# Altium PCB PCB2.PcbDoc
Units mm, origin at the board's own origin, x right, y up, seen from the top; angles counter-clockwise.
Board outline 160 x 150 mm, 2 copper layers (Top Layer, Bottom Layer); 398 components, 242 nets, 1225 pads, 0 vias.
Unrouted connection lines stored in the file: 874.
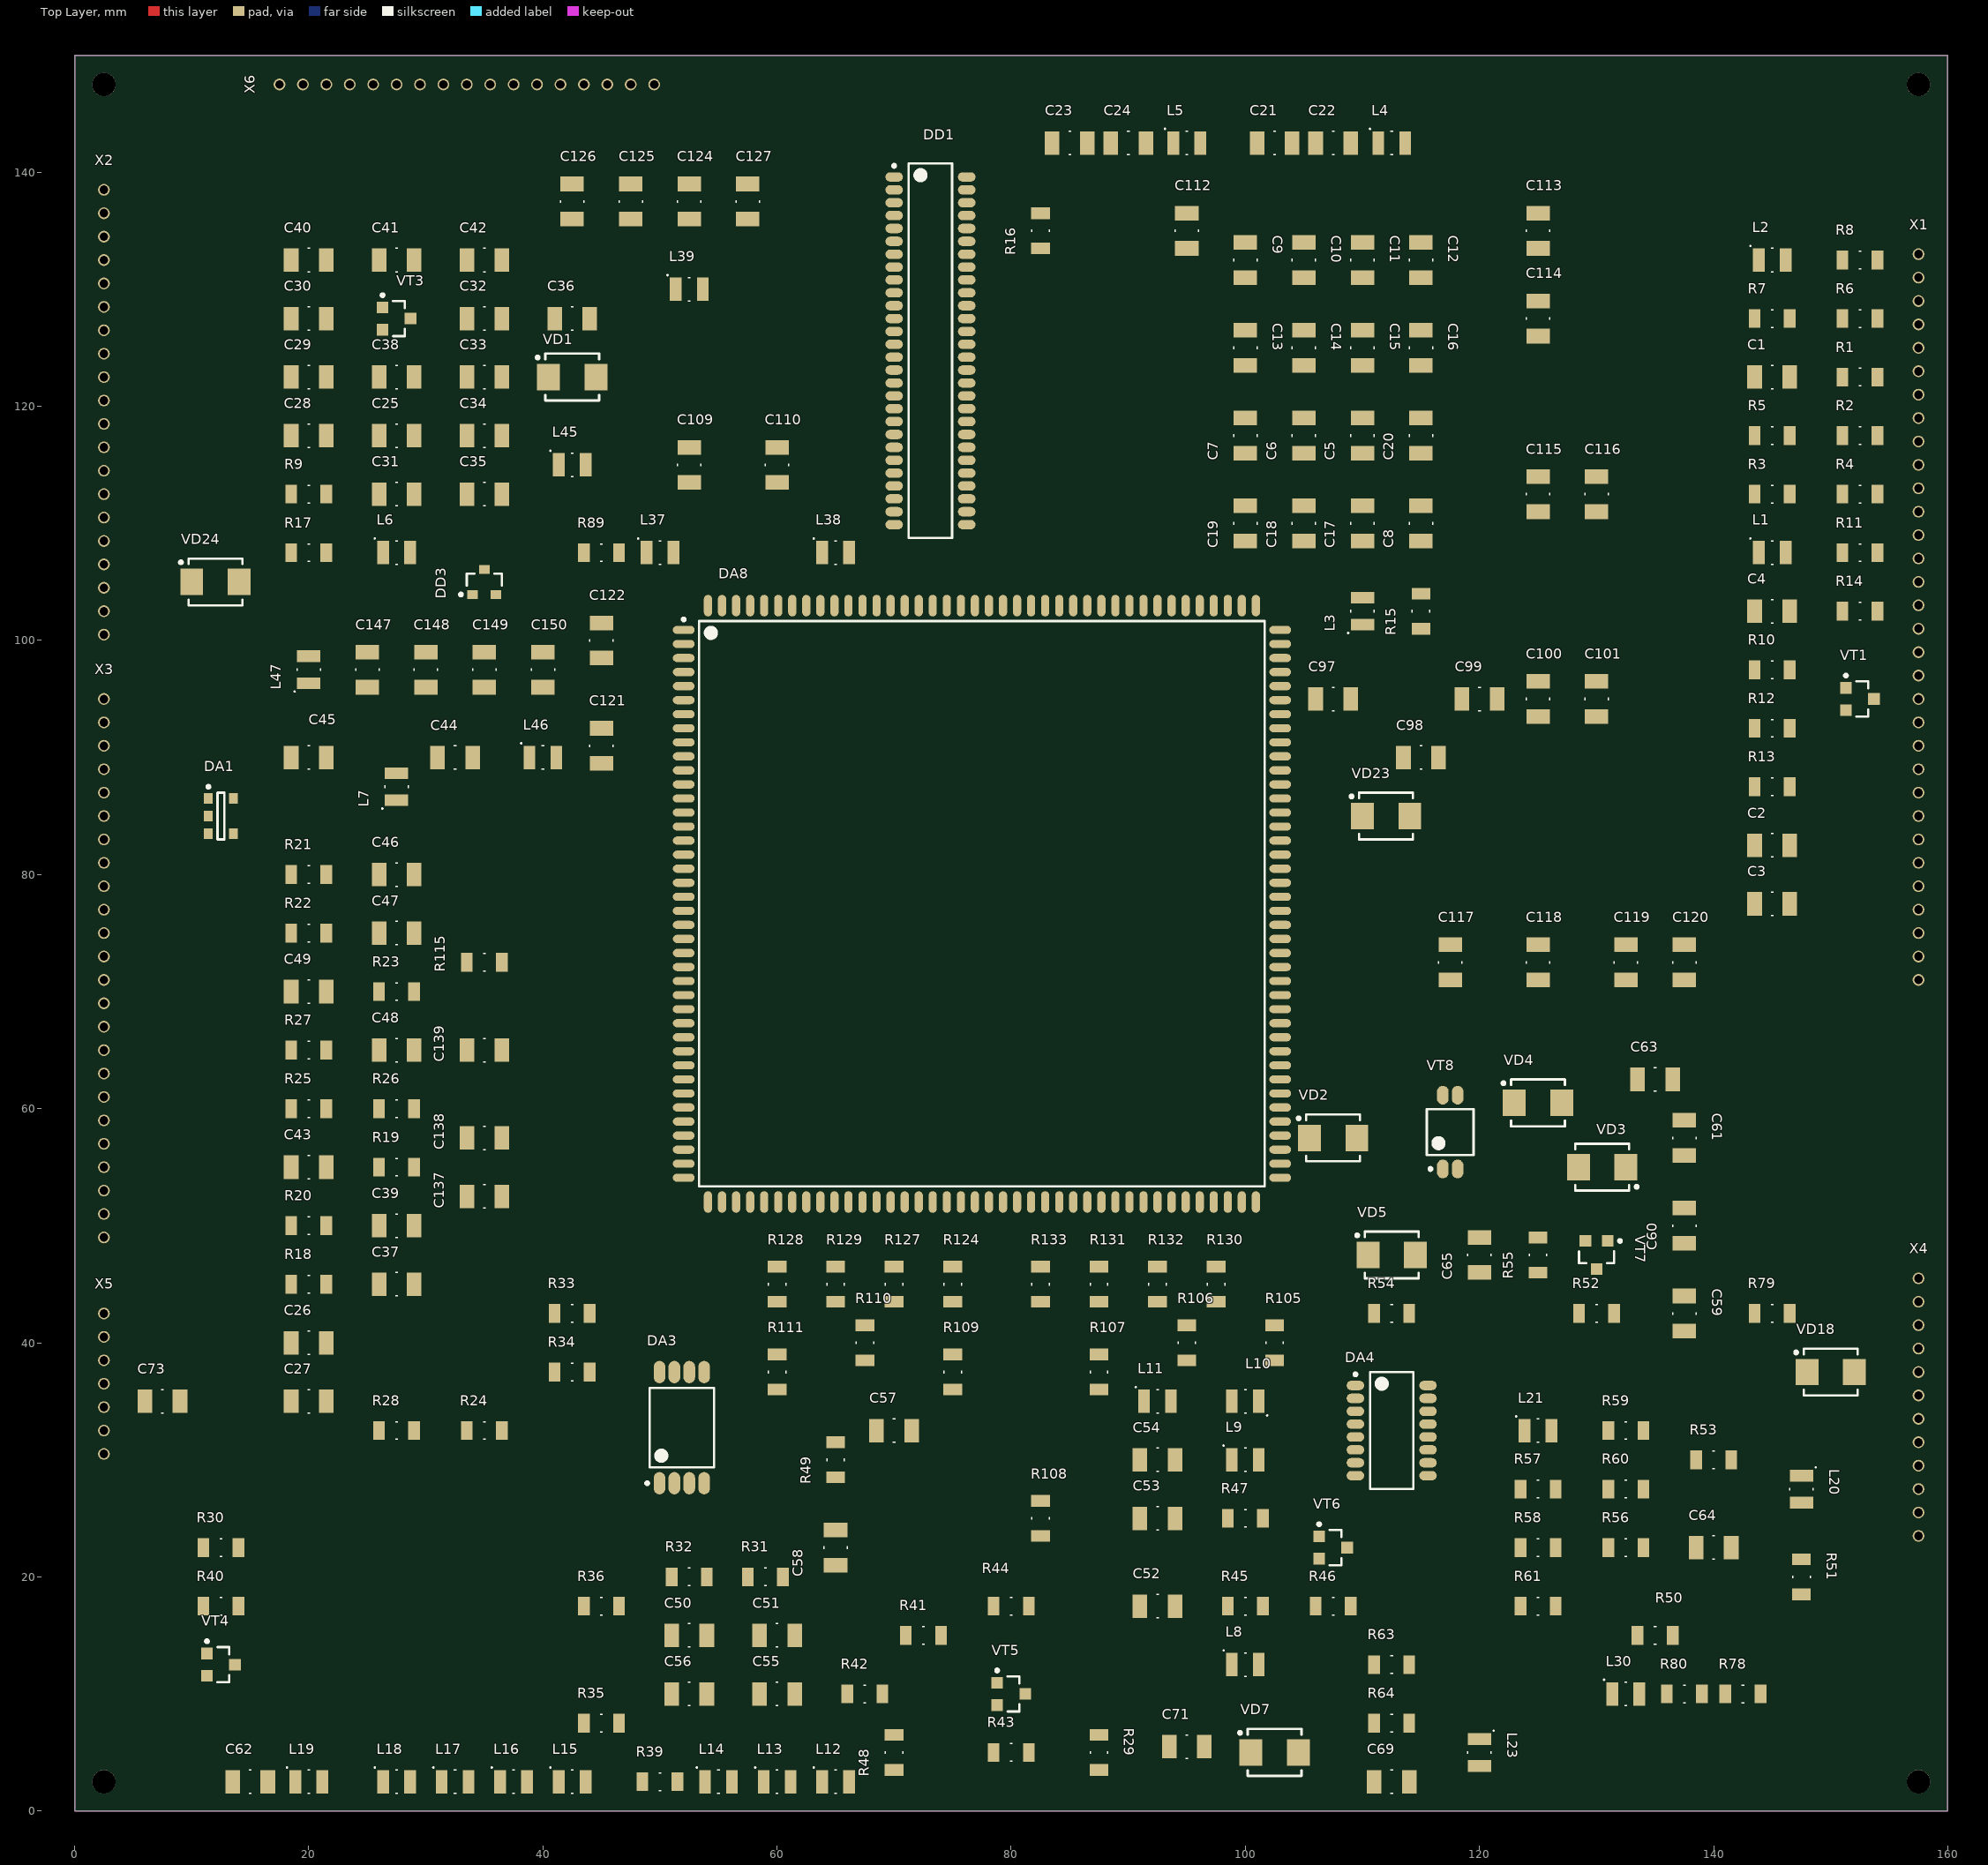
[diagram p0: Top Layer view]
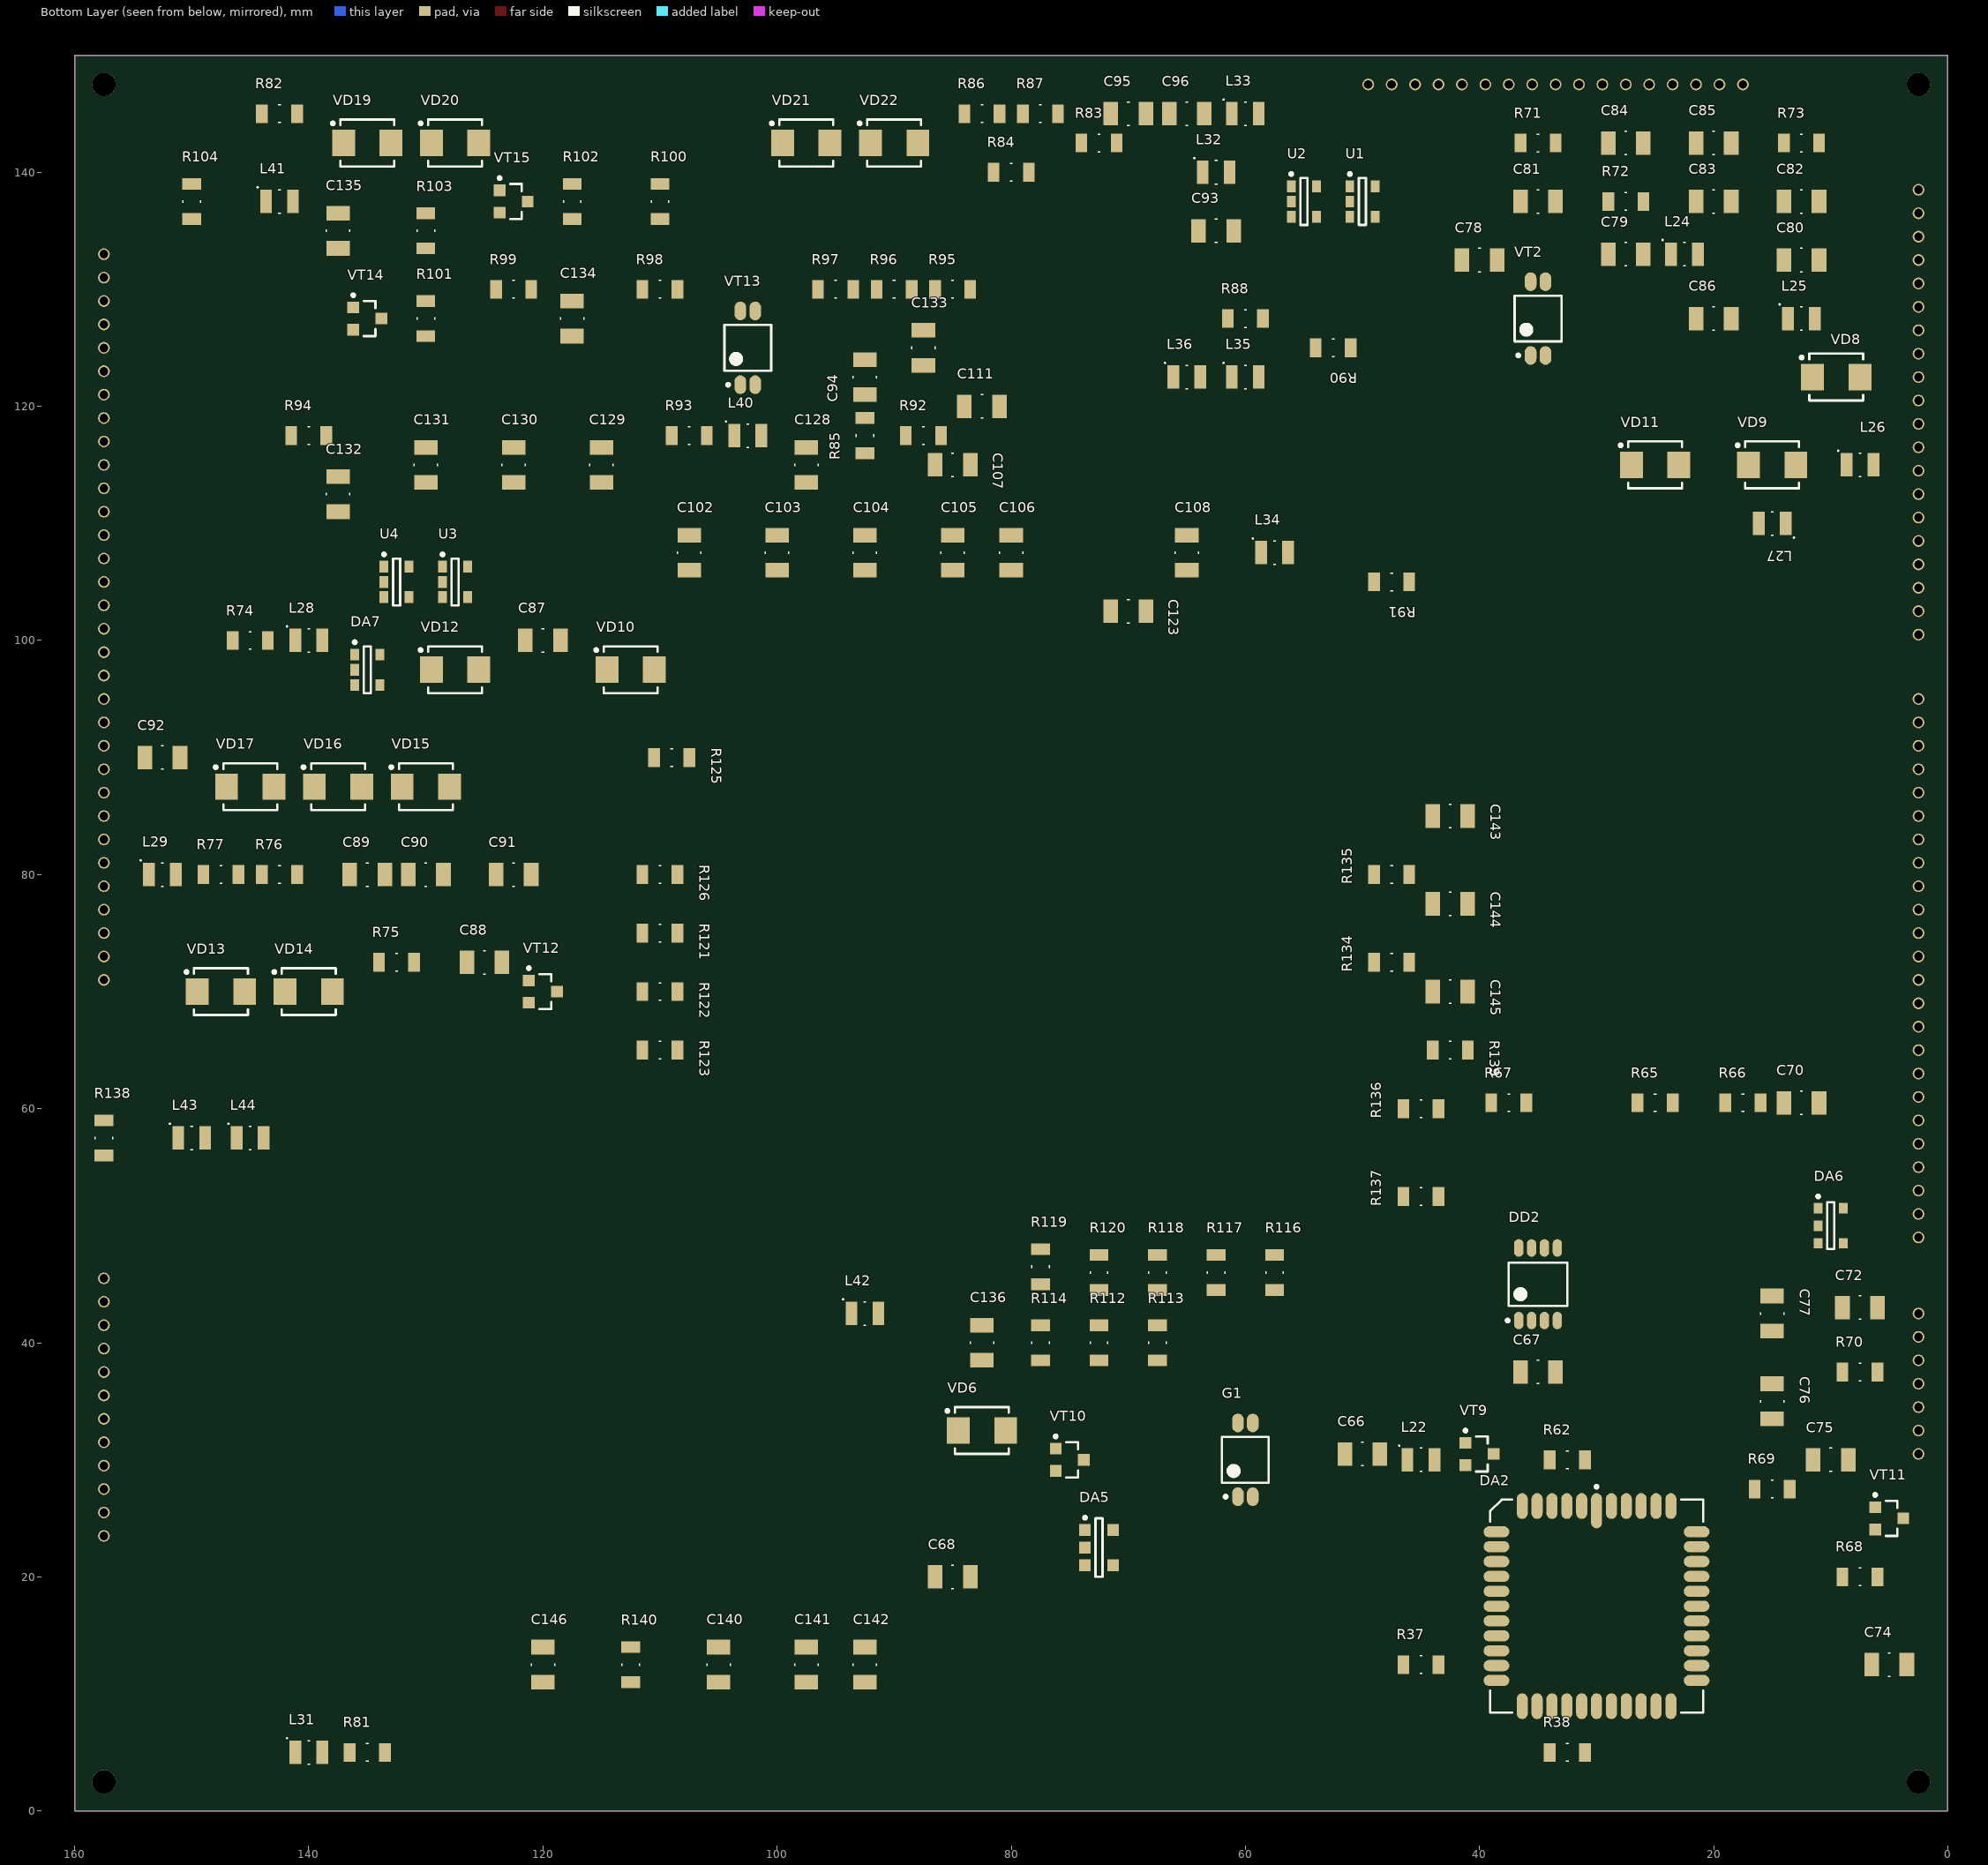
[diagram p1: Bottom Layer view, seen from below]

## Layer stack, top to bottom
Top Solder: solder mask 0.0102, Solder Resist, Dk 3.5
Top Layer: signal copper 0.0356
Dielectric 1: dielectric 0.32, FR-4, Dk 4.8
Bottom Layer: signal copper 0.0356
Bottom Solder: solder mask 0.0102, Solder Resist, Dk 3.5

## Board outline
0,0 160,0 160,150 0,150

## Design rules (kind name [scope] priority, off if disabled: settings)
Clearance [All] p1: gap=0.254 ignorepadtopadclearanceinfootprint=FALSE except(0: Arc-Hole Track-Hole SMDPad-Hole THPad-Hole Via-Hole Fill-Hole Poly-Hole Region-Hole Text-Hole)
HoleToHoleClearance [All] p1: gap=0.1 allowstackedmicrovias=TRUE
MinimumSolderMaskSliver [All] p1: minsoldermaskwidth=0.06
PolygonConnect [All] p1: connectstyle=Relief reliefconductorwidth=0.254 reliefentries=4 polygonreliefangle="90 Angle" airgapwidth=0.254
RoomDefinition sch1 [InComponentClass('All Components')] p1: confinementstyle=ConfineIn formatcopy=TRUE lockcomponents=FALSE outline 0,0 160,0 160,150 0,150
RoutingVias [All] p1: holewidth=0.711 width=1.27 viastyle="Through Hole" minholewidth=0.711 minwidth=1.27 maxholewidth=0.711 maxwidth=1.27
SilkToSilkClearance [All] p1: silktosilkclearance=0.2
SilkToSolderMaskClearance [IsPad] p1: minsilkscreentomaskgap=0.1 clearancetoexposedcopper=TRUE
SolderMaskExpansion [All] p1: expansion=0.102
Width "VCC-GND Width" [InNetClass('Special Signals')] p1: maxlimit=0.5 minlimit=0.25 preferedwidth=0.25 minimp=50.000000 maximp=50.000000 favimp=50.000000 // GND and VCC
Width "Other Signal Width" [(not InNetClass('Special Signals'))] p2: maxlimit=0.25 minlimit=0.1 preferedwidth=0.1 minimp=50.000000 maximp=50.000000 favimp=50.000000
26 further rules are at their usual default settings.

## Classes and differential pairs
component class sch6: C86 C87 C88 C89 C90 C91 C92 C93 C94 C95 C96 DA7 L26 L27 L28 L29 L30 L31 L32 L33 R74 R75 R76 R77 R78 R79 R80 R81 R82 R83 R84 R85 R86 R87 U1 U2 U3 U4 VD8 VD9 VD10 VD11 VD12 VD13 VD14 VD15 VD16 VD17 VD18 VD19 VD20 VD21 VD22 VT12 X6
component class sch5_1: C97 C98 C99 C100 C101 C102 C103 C104 C105 C106 C107 C108 C109 C110 C111 C112 C113 C114 C115 C116 C117 C118 C119 C120 C121 C122 C123 C124 C125 C126 C127 C128 C129 C130 C131 C132 C133 C134 C135 C136 C137 C138 C139 C140 C141 C142 C143 C144 C145 C146 C147 C148 C149 C150 DA8 DD3 G1 L34 L35 L36 L37 L38 L39 L40 L41 L42 L43 L44 L45 L46 L47 R88 R89 R90 R91 R92 R93 R94 R95 R96 R97 R98 R99 R100 R101 R102 R103 R104 R105 R106 R107 R108 R109 R110 R111 R112 R113 R114 R115 R116 R117 R118 R119 R120 R121 R122 R123 R124 R125 R126 R127 R128 R129 R130 R131 R132 R133 R134 R135 R136 R137 R138 R139 R140 VD23 VD24 VT13 VT14 VT15
component class sch4: C63 C64 C65 C66 C67 C68 C69 C70 C71 C72 C73 C74 C75 C76 C77 C78 C79 C80 C81 C82 C83 C84 C85 DA4 DA5 DA6 DD2 L20 L21 L22 L23 L24 L25 R50 R51 R52 R53 R54 R55 R56 R57 R58 R59 R60 R61 R62 R63 R64 R65 R66 R67 R68 R69 R70 R71 R72 R73 VD2 VD3 VD4 VD5 VD6 VD7 VT7 VT8 VT9 VT10 VT11 X5
component class sch3: C44 C45 C46 C47 C48 C49 C50 C51 C52 C53 C54 C55 C56 C57 C58 C59 C60 C61 C62 DA1 DA2 DA3 L7 L8 L9 L10 L11 L12 L13 L14 L15 L16 L17 L18 L19 R21 R22 R23 R24 R25 R26 R27 R28 R29 R30 R31 R32 R33 R34 R35 R36 R37 R38 R39 R40 R41 R42 R43 R44 R45 R46 R47 R48 R49 VT4 VT5 VT6 X3 X4
component class sch2: C5 C6 C7 C8 C9 C10 C11 C12 C13 C14 C15 C16 C17 C18 C19 C20 C21 C22 C23 C24 C25 C26 C27 C28 C29 C30 C31 C32 C33 C34 C35 C36 C37 C38 C39 C40 C41 C42 C43 DD1 L3 L4 L5 L6 R15 R16 R17 R18 R19 R20 VD1 VT2 VT3 X2
component class sch1: C1 C2 C3 C4 L1 L2 R1 R2 R3 R4 R5 R6 R7 R8 R9 R10 R11 R12 R13 R14 VT1 X1
net class "Special Signals": AGND GND VCC

## Components (designator, comment, footprint, x,y, rotation, side; value= is the part's Value field where it differs from the comment)
C1 "*" "Capacitor 0805" 145,122.5 r0 top
C2 "*" "Capacitor 0805" 145,82.5 r0 top
C3 "*" "Capacitor 0805" 145,77.5 r0 top
C4 "*" "Capacitor 0805" 145,102.5 r0 top
C5 "*" "Capacitor 0805" 110,117.5 r90 top
C6 "*" "Capacitor 0805" 105,117.5 r90 top
C7 "*" "Capacitor 0805" 100,117.5 r90 top
C8 "*" "Capacitor 0805" 115,110 r90 top
C9 "*" "Capacitor 0805" 100,132.5 r270 top
C10 "*" "Capacitor 0805" 105,132.5 r270 top
C11 "*" "Capacitor 0805" 110,132.5 r270 top
C12 "*" "Capacitor 0805" 115,132.5 r270 top
C13 "*" "Capacitor 0805" 100,125 r270 top
C14 "*" "Capacitor 0805" 105,125 r270 top
C15 "*" "Capacitor 0805" 110,125 r270 top
C16 "*" "Capacitor 0805" 115,125 r270 top
C17 "*" "Capacitor 0805" 110,110 r90 top
C18 "*" "Capacitor 0805" 105,110 r90 top
C19 "*" "Capacitor 0805" 100,110 r90 top
C20 "*" "Capacitor 0805" 115,117.5 r90 top
C21 "*" "Capacitor 0805" 102.5,142.5 r0 top
C22 "*" "Capacitor 0805" 107.5,142.5 r0 top
C23 "*" "Capacitor 0805" 85,142.5 r0 top
C24 "*" "Capacitor 0805" 90,142.5 r0 top
C25 "*" "Capacitor 0805" 27.5,117.5 r0 top
C26 "*" "Capacitor 0805" 20,40 r0 top
C27 "*" "Capacitor 0805" 20,35 r0 top
C28 "*" "Capacitor 0805" 20,117.5 r0 top
C29 "*" "Capacitor 0805" 20,122.5 r0 top
C30 "*" "Capacitor 0805" 20,127.5 r0 top
C31 "*" "Capacitor 0805" 27.5,112.5 r0 top
C32 "*" "Capacitor 0805" 35,127.5 r0 top
C33 "*" "Capacitor 0805" 35,122.5 r0 top
C34 "*" "Capacitor 0805" 35,117.5 r0 top
C35 "*" "Capacitor 0805" 35,112.5 r0 top
C36 "*" "Capacitor 0805" 42.5,127.5 r0 top
C37 "*" "Capacitor 0805" 27.5,45 r0 top
C38 "*" "Capacitor 0805" 27.5,122.5 r0 top
C39 "*" "Capacitor 0805" 27.5,50 r0 top
C40 "*" "Capacitor 0805" 20,132.5 r0 top
C41 "*" "Capacitor 0805" 27.5,132.5 r0 top
C42 "*" "Capacitor 0805" 35,132.5 r0 top
C43 "*" "Capacitor 0805" 20,55 r0 top
C44 "*" "Capacitor 0805" 32.5,90 r0 top
C45 "*" "Capacitor 0805" 20,90 r180 top
C46 "*" "Capacitor 0805" 27.5,80 r0 top
C47 "*" "Capacitor 0805" 27.5,75 r0 top
C48 "*" "Capacitor 0805" 27.5,65 r0 top
C49 "*" "Capacitor 0805" 20,70 r0 top
C50 "*" "Capacitor 0805" 52.5,15 r0 top
C51 "*" "Capacitor 0805" 60,15 r0 top
C52 "*" "Capacitor 0805" 92.5,17.5 r0 top
C53 "*" "Capacitor 0805" 92.5,25 r0 top
C54 "*" "Capacitor 0805" 92.5,30 r0 top
C55 "*" "Capacitor 0805" 60,10 r0 top
C56 "*" "Capacitor 0805" 52.5,10 r0 top
C57 "*" "Capacitor 0805" 70,32.5 r0 top
C58 "*" "Capacitor 0805" 65,22.5 r270 top
C59 "*" "Capacitor 0805" 137.5,42.5 r270 top
C60 "*" "Capacitor 0805" 137.5,50 r90 top
C61 "*" "Capacitor 0805" 137.5,57.5 r270 top
C62 "*" "Capacitor 0805" 15,2.5 r0 top
C63 "*" "Capacitor 0805" 135,62.5 r0 top
C64 "*" "Capacitor 0805" 140,22.5 r0 top
C65 "*" "Capacitor 0805" 120,47.5 r90 top
C66 "*" "Capacitor 0805" 50,30.5 r180 bottom
C67 "*" "Capacitor 0805" 35,37.5 r180 bottom
C68 "*" "Capacitor 0805" 85,20 r180 bottom
C69 "*" "Capacitor 0805" 112.5,2.5 r0 top
C70 "*" "Capacitor 0805" 12.5,60.5 r180 bottom
C71 "*" "Capacitor 0805" 95,5.5 r0 top
C72 "*" "Capacitor 0805" 7.5,43 r180 bottom
C73 "*" "Capacitor 0805" 7.5,35 r0 top
C74 "*" "Capacitor 0805" 5,12.5 r180 bottom
C75 "*" "Capacitor 0805" 10,30 r180 bottom
C76 "*" "Capacitor 0805" 15,35 r270 bottom
C77 "*" "Capacitor 0805" 15,42.5 r270 bottom
C78 "*" "Capacitor 0805" 40,132.5 r180 bottom
C79 "*" "Capacitor 0805" 27.5,133 r180 bottom
C80 "*" "Capacitor 0805" 12.5,132.5 r180 bottom
C81 "*" "Capacitor 0805" 35,137.5 r180 bottom
C82 "*" "Capacitor 0805" 12.5,137.5 r180 bottom
C83 "*" "Capacitor 0805" 20,137.5 r180 bottom
C84 "*" "Capacitor 0805" 27.5,142.5 r180 bottom
C85 "*" "Capacitor 0805" 20,142.5 r180 bottom
C86 "*" "Capacitor 0805" 20,127.5 r180 bottom
C87 "*" "Capacitor 0805" 120,100 r180 bottom
C88 "*" "Capacitor 0805" 125,72.5 r180 bottom
C89 "*" "Capacitor 0805" 135,80 r180 bottom
C90 "*" "Capacitor 0805" 130,80 r180 bottom
C91 "*" "Capacitor 0805" 122.5,80 r180 bottom
C92 "*" "Capacitor 0805" 152.5,90 r180 bottom
C93 "*" "Capacitor 0805" 62.5,135 r180 bottom
C94 "*" "Capacitor 0805" 92.5,122.5 r90 bottom
C95 "*" "Capacitor 0805" 70,145 r180 bottom
C96 "*" "Capacitor 0805" 65,145 r180 bottom
C97 "*" "Capacitor 0805" 107.5,95 r0 top
C98 "*" "Capacitor 0805" 115,90 r0 top
C99 "*" "Capacitor 0805" 120,95 r0 top
C100 "*" "Capacitor 0805" 125,95 r90 top
C101 "*" "Capacitor 0805" 130,95 r90 top
C102 "*" "Capacitor 0805" 107.5,107.5 r90 bottom
C103 "*" "Capacitor 0805" 100,107.5 r90 bottom
C104 "*" "Capacitor 0805" 92.5,107.5 r90 bottom
C105 "*" "Capacitor 0805" 85,107.5 r90 bottom
C106 "*" "Capacitor 0805" 80,107.5 r90 bottom
C107 "*" "Capacitor 0805" 85,115 r180 bottom
C108 "*" "Capacitor 0805" 65,107.5 r90 bottom
C109 "*" "Capacitor 0805" 52.5,115 r90 top
C110 "*" "Capacitor 0805" 60,115 r90 top
C111 "*" "Capacitor 0805" 82.5,120 r180 bottom
C112 "*" "Capacitor 0805" 95,135 r90 top
C113 "*" "Capacitor 0805" 125,135 r90 top
C114 "*" "Capacitor 0805" 125,127.5 r90 top
C115 "*" "Capacitor 0805" 125,112.5 r90 top
C116 "*" "Capacitor 0805" 130,112.5 r90 top
C117 "*" "Capacitor 0805" 117.5,72.5 r90 top
C118 "*" "Capacitor 0805" 125,72.5 r90 top
C119 "*" "Capacitor 0805" 132.5,72.5 r90 top
C120 "*" "Capacitor 0805" 137.5,72.5 r90 top
C121 "*" "Capacitor 0805" 45,91 r90 top
C122 "*" "Capacitor 0805" 45,100 r90 top
C123 "*" "Capacitor 0805" 70,102.5 r180 bottom
C124 "*" "Capacitor 0805" 52.5,137.5 r90 top
C125 "*" "Capacitor 0805" 47.5,137.5 r90 top
C126 "*" "Capacitor 0805" 42.5,137.5 r90 top
C127 "*" "Capacitor 0805" 57.5,137.5 r90 top
C128 "*" "Capacitor 0805" 97.5,115 r90 bottom
C129 "*" "Capacitor 0805" 115,115 r90 bottom
C130 "*" "Capacitor 0805" 122.5,115 r90 bottom
C131 "*" "Capacitor 0805" 130,115 r90 bottom
C132 "*" "Capacitor 0805" 137.5,112.5 r90 bottom
C133 "*" "Capacitor 0805" 87.5,125 r90 bottom
C134 "*" "Capacitor 0805" 117.5,127.5 r90 bottom
C135 "*" "Capacitor 0805" 137.5,135 r90 bottom
C136 "*" "Capacitor 0805" 82.5,40 r90 bottom
C137 "*" "Capacitor 0805" 35,52.5 r180 top
C138 "*" "Capacitor 0805" 35,57.5 r180 top
C139 "*" "Capacitor 0805" 35,65 r180 top
C140 "*" "Capacitor 0805" 105,12.5 r90 bottom
C141 "*" "Capacitor 0805" 97.5,12.5 r90 bottom
C142 "*" "Capacitor 0805" 92.5,12.5 r90 bottom
C143 "*" "Capacitor 0805" 42.5,85 r180 bottom
C144 "*" "Capacitor 0805" 42.5,77.5 r180 bottom
C145 "*" "Capacitor 0805" 42.5,70 r180 bottom
C146 "*" "Capacitor 0805" 120,12.5 r90 bottom
C147 "*" "Capacitor 0805" 25,97.5 r90 top
C148 "*" "Capacitor 0805" 30,97.5 r90 top
C149 "*" "Capacitor 0805" 35,97.5 r90 top
C150 "*" "Capacitor 0805" 40,97.5 r90 top
DA1 "IC103" IC103_2 12.5,85 r0 top
DA2 "*" NT68 30,17.5 r180 bottom
DA3 "*" IC102 51.865,32.75 r90 top
DA4 "*" AP494A_1 112.5,32.5 r0 top
DA5 "*" PQ05 72.5,22.5 r180 bottom
DA6 "IC103" IC103_2 10,50 r180 bottom
DA7 "*" MIC5205 135,97.5 r180 bottom
DA8 "*" OMG_1 77.5,77.5 r0 top
DD1 "*" THC63_1 73.1,124.75 r0 top
DD2 "*" "D FF 2" 35,45 r90 bottom
DD3 "*" MIC39 35,105 r90 top
G1 "*" GENERATOR-25MHZ 60,30 r90 bottom
L1 "*" "Inductor 2520" 145,107.5 r0 top
L2 "*" "Inductor 2520" 145,132.5 r0 top
L3 "*" "Inductor 2520" 110,102.5 r90 top
L4 "*" "Inductor 2520" 112.5,142.5 r0 top
L5 "*" "Inductor 2520" 95,142.5 r0 top
L6 "*" "Inductor 2520" 27.5,107.5 r0 top
L7 "*" "Inductor 2520" 27.5,87.5 r90 top
L8 "*" "Inductor 2520" 100,12.5 r0 top
L9 "*" "Inductor 2520" 100,30 r0 top
L10 "*" "Inductor 2520" 100,35 r180 top
L11 "*" "Inductor 2520" 92.5,35 r0 top
L12 "*" "Inductor 2520" 65,2.5 r0 top
L13 "*" "Inductor 2520" 60,2.5 r0 top
L14 "*" "Inductor 2520" 55,2.5 r0 top
L15 "*" "Inductor 2520" 42.5,2.5 r0 top
L16 "*" "Inductor 2520" 37.5,2.5 r0 top
L17 "*" "Inductor 2520" 32.5,2.5 r0 top
L18 "*" "Inductor 2520" 27.5,2.5 r0 top
L19 "*" "Inductor 2520" 20,2.5 r0 top
L20 "*" "Inductor 2520" 147.5,27.5 r270 top
L21 "*" "Inductor 2520" 125,32.5 r0 top
L22 "*" "Inductor 2520" 45,30 r180 bottom
L23 "*" "Inductor 2520" 120,5 r270 top
L24 "*" "Inductor 2520" 22.5,133 r180 bottom
L25 "*" "Inductor 2520" 12.5,127.5 r180 bottom
L26 "*" "Inductor 2520" 7.5,115 r180 bottom
L27 "*" "Inductor 2520" 15,110 r0 bottom
L28 "*" "Inductor 2520" 140,100 r180 bottom
L29 "*" "Inductor 2520" 152.5,80 r180 bottom
L30 "*" "Inductor 2520" 132.5,10 r0 top
L31 "*" "Inductor 2520" 140,5 r180 bottom
L32 "*" "Inductor 2520" 62.5,140 r180 bottom
L33 "*" "Inductor 2520" 60,145 r180 bottom
L34 "*" "Inductor 2520" 57.5,107.5 r180 bottom
L35 "*" "Inductor 2520" 60,122.5 r180 bottom
L36 "*" "Inductor 2520" 65,122.5 r180 bottom
L37 "*" "Inductor 2520" 50,107.5 r0 top
L38 "*" "Inductor 2520" 65,107.5 r0 top
L39 "*" "Inductor 2520" 52.5,130 r0 top
L40 "*" "Inductor 2520" 102.5,117.5 r180 bottom
L41 "*" "Inductor 2520" 142.5,137.5 r180 bottom
L42 "*" "Inductor 2520" 92.5,42.5 r180 bottom
L43 "*" "Inductor 2520" 150,57.5 r180 bottom
L44 "*" "Inductor 2520" 145,57.5 r180 bottom
L45 "*" "Inductor 2520" 42.5,115 r0 top
L46 "*" "Inductor 2520" 40,90 r0 top
L47 "*" "Inductor 2520" 20,97.5 r90 top
R1 "*" "Resistor 1206" 152.5,122.5 r0 top
R2 "*" "Resistor 1206" 152.5,117.5 r0 top
R3 "*" "Resistor 1206" 145,112.5 r0 top
R4 "*" "Resistor 1206" 152.5,112.5 r0 top
R5 "*" "Resistor 1206" 145,117.5 r0 top
R6 "*" "Resistor 1206" 152.5,127.5 r0 top
R7 "*" "Resistor 1206" 145,127.5 r0 top
R8 "*" "Resistor 1206" 152.5,132.5 r0 top
R9 "*" "Resistor 1206" 20,112.5 r0 top
R10 "*" "Resistor 1206" 145,97.5 r0 top
R11 "*" "Resistor 1206" 152.5,107.5 r0 top
R12 "*" "Resistor 1206" 145,92.5 r0 top
R13 "*" "Resistor 1206" 145,87.5 r0 top
R14 "*" "Resistor 1206" 152.5,102.5 r0 top
R15 "*" "Resistor 1206" 115,102.5 r90 top
R16 "*" "Resistor 1206" 82.5,135 r90 top
R17 "*" "Resistor 1206" 20,107.5 r0 top
R18 "*" "Resistor 1206" 20,45 r0 top
R19 "*" "Resistor 1206" 27.5,55 r0 top
R20 "*" "Resistor 1206" 20,50 r0 top
R21 "*" "Resistor 1206" 20,80 r0 top
R22 "*" "Resistor 1206" 20,75 r0 top
R23 "*" "Resistor 1206" 27.5,70 r0 top
R24 "*" "Resistor 1206" 35,32.5 r0 top
R25 "*" "Resistor 1206" 20,60 r0 top
R26 "*" "Resistor 1206" 27.5,60 r0 top
R27 "*" "Resistor 1206" 20,65 r0 top
R28 "*" "Resistor 1206" 27.5,32.5 r0 top
R29 "*" "Resistor 1206" 87.5,5 r270 top
R30 "*" "Resistor 1206" 12.5,22.5 r0 top
R31 "*" "Resistor 1206" 59,20 r0 top
R32 "*" "Resistor 1206" 52.5,20 r0 top
R33 "*" "Resistor 1206" 42.5,42.5 r0 top
R34 "*" "Resistor 1206" 42.5,37.5 r0 top
R35 "*" "Resistor 1206" 45,7.5 r0 top
R36 "*" "Resistor 1206" 45,17.5 r0 top
R37 "*" "Resistor 1206" 45,12.5 r180 bottom
R38 "*" "Resistor 1206" 32.5,5 r180 bottom
R39 "*" "Resistor 1206" 50,2.5 r0 top
R40 "*" "Resistor 1206" 12.5,17.5 r0 top
R41 "*" "Resistor 1206" 72.5,15 r0 top
R42 "*" "Resistor 1206" 67.5,10 r0 top
R43 "*" "Resistor 1206" 80,5 r0 top
R44 "*" "Resistor 1206" 80,17.5 r180 top
R45 "*" "Resistor 1206" 100,17.5 r0 top
R46 "*" "Resistor 1206" 107.5,17.5 r0 top
R47 "*" "Resistor 1206" 100,25 r0 top
R48 "*" "Resistor 1206" 70,5 r90 top
R49 "*" "Resistor 1206" 65,30 r90 top
R50 "*" "Resistor 1206" 135,15 r180 top
R51 "*" "Resistor 1206" 147.5,20 r270 top
R52 "*" "Resistor 1206" 130,42.5 r0 top
R53 "*" "Resistor 1206" 140,30 r0 top
R54 "*" "Resistor 1206" 112.5,42.5 r0 top
R55 "*" "Resistor 1206" 125,47.5 r90 top
R56 "*" "Resistor 1206" 132.5,22.5 r0 top
R57 "*" "Resistor 1206" 125,27.5 r0 top
R58 "*" "Resistor 1206" 125,22.5 r0 top
R59 "*" "Resistor 1206" 132.5,32.5 r0 top
R60 "*" "Resistor 1206" 132.5,27.5 r0 top
R61 "*" "Resistor 1206" 125,17.5 r0 top
R62 "*" "Resistor 1206" 32.5,30 r180 bottom
R63 "*" "Resistor 1206" 112.5,12.5 r0 top
R64 "*" "Resistor 1206" 112.5,7.5 r0 top
R65 "*" "Resistor 1206" 25,60.5 r180 bottom
R66 "*" "Resistor 1206" 17.5,60.5 r180 bottom
R67 "*" "Resistor 1206" 37.5,60.5 r180 bottom
R68 "*" "Resistor 1206" 7.5,20 r180 bottom
R69 "*" "Resistor 1206" 15,27.5 r180 bottom
R70 "*" "Resistor 1206" 7.5,37.5 r180 bottom
R71 "*" "Resistor 1206" 35,142.5 r180 bottom
R72 "*" "Resistor 1206" 27.5,137.5 r180 bottom
R73 "*" "Resistor 1206" 12.5,142.5 r180 bottom
R74 "*" "Resistor 1206" 145,100 r180 bottom
R75 "*" "Resistor 1206" 132.5,72.5 r180 bottom
R76 "*" "Resistor 1206" 142.5,80 r180 bottom
R77 "*" "Resistor 1206" 147.5,80 r180 bottom
R78 "*" "Resistor 1206" 142.5,10 r0 top
R79 "*" "Resistor 1206" 145,42.5 r0 top
R80 "*" "Resistor 1206" 137.5,10 r0 top
R81 "*" "Resistor 1206" 135,5 r180 bottom
R82 "*" "Resistor 1206" 142.5,145 r180 bottom
R83 "*" "Resistor 1206" 72.5,142.5 r180 bottom
R84 "*" "Resistor 1206" 80,140 r180 bottom
R85 "*" "Resistor 1206" 92.5,117.5 r90 bottom
R86 "*" "Resistor 1206" 82.5,145 r180 bottom
R87 "*" "Resistor 1206" 77.5,145 r180 bottom
R88 "*" "Resistor 1206" 60,127.5 r180 bottom
R89 "*" "Resistor 1206" 45,107.5 r0 top
R90 "*" "Resistor 1206" 52.5,125 r0 bottom
R91 "*" "Resistor 1206" 47.5,105 r0 bottom
R92 "*" "Resistor 1206" 87.5,117.5 r180 bottom
R93 "*" "Resistor 1206" 107.5,117.5 r180 bottom
R94 "*" "Resistor 1206" 140,117.5 r180 bottom
R95 "*" "Resistor 1206" 85,130 r180 bottom
R96 "*" "Resistor 1206" 90,130 r180 bottom
R97 "*" "Resistor 1206" 95,130 r180 bottom
R98 "*" "Resistor 1206" 110,130 r180 bottom
R99 "*" "Resistor 1206" 122.5,130 r180 bottom
R100 "*" "Resistor 1206" 110,137.5 r90 bottom
R101 "*" "Resistor 1206" 130,127.5 r90 bottom
R102 "*" "Resistor 1206" 117.5,137.5 r90 bottom
R103 "*" "Resistor 1206" 130,135 r90 bottom
R104 "*" "Resistor 1206" 150,137.5 r90 bottom
R105 "*" "Resistor 1206" 102.5,40 r90 top
R106 "*" "Resistor 1206" 95,40 r90 top
R107 "*" "Resistor 1206" 87.5,37.5 r90 top
R108 "*" "Resistor 1206" 82.5,25 r90 top
R109 "*" "Resistor 1206" 75,37.5 r90 top
R110 "*" "Resistor 1206" 67.5,40 r90 top
R111 "*" "Resistor 1206" 60,37.5 r90 top
R112 "*" "Resistor 1206" 72.5,40 r90 bottom
R113 "*" "Resistor 1206" 67.5,40 r90 bottom
R114 "*" "Resistor 1206" 77.5,40 r90 bottom
R115 "*" "Resistor 1206" 35,72.5 r180 top
R116 "*" "Resistor 1206" 57.5,46 r90 bottom
R117 "*" "Resistor 1206" 62.5,46 r90 bottom
R118 "*" "Resistor 1206" 67.5,46 r90 bottom
R119 "*" "Resistor 1206" 77.5,46.5 r90 bottom
R120 "*" "Resistor 1206" 72.5,46 r90 bottom
R121 "*" "Resistor 1206" 110,75 r180 bottom
R122 "*" "Resistor 1206" 110,70 r180 bottom
R123 "*" "Resistor 1206" 110,65 r180 bottom
R124 "*" "Resistor 1206" 75,45 r90 top
R125 "*" "Resistor 1206" 109,90 r180 bottom
R126 "*" "Resistor 1206" 110,80 r180 bottom
R127 "*" "Resistor 1206" 70,45 r90 top
R128 "*" "Resistor 1206" 60,45 r90 top
R129 "*" "Resistor 1206" 65,45 r90 top
R130 "*" "Resistor 1206" 97.5,45 r90 top
R131 "*" "Resistor 1206" 87.5,45 r90 top
R132 "*" "Resistor 1206" 92.5,45 r90 top
R133 "*" "Resistor 1206" 82.5,45 r90 top
R134 "*" "Resistor 1206" 47.5,72.5 r0 bottom
R135 "*" "Resistor 1206" 47.5,80 r0 bottom
R136 "*" "Resistor 1206" 45,60 r0 bottom
R137 "*" "Resistor 1206" 45,52.5 r0 bottom
R138 "*" "Resistor 1206" 157.5,57.5 r90 bottom
R139 "*" "Resistor 1206" 42.5,65 r180 bottom
R140 "*" "Resistor 1206" 112.5,12.5 r90 bottom
U1 "*" MIC5205 50,137.5 r180 bottom
U2 "*" MIC5205 55,137.5 r180 bottom
U3 "*" MIC5205 127.5,105 r180 bottom
U4 "*" MIC5205 132.5,105 r180 bottom
VD1 "Diode 1" Diode 42.5,122.5 r0 top
VD2 "*" Diode 107.5,57.5 r0 top
VD3 "*" Diode 130.475,55 r180 top
VD4 "Diode 1" Diode 125,60.5 r0 top
VD5 "*" Diode 112.5,47.5 r0 top
VD6 "*" Diode 82.5,32.5 r180 bottom
VD7 "*" Diode 102.5,5 r0 top
VD8 "*" Diode 9.525,122.5 r180 bottom
VD9 "*" Diode 15,115 r180 bottom
VD10 "*" Diode 112.5,97.5 r180 bottom
VD11 "*" Diode 25,115 r180 bottom
VD12 "*" Diode 127.5,97.5 r180 bottom
VD13 "*" Diode 147.5,70 r180 bottom
VD14 "*" Diode 140,70 r180 bottom
VD15 "*" Diode 130,87.5 r180 bottom
VD16 "*" Diode 137.5,87.5 r180 bottom
VD17 "*" Diode 145,87.5 r180 bottom
VD18 "*" Diode 150,37.5 r0 top
VD19 "*" Diode 135,142.5 r180 bottom
VD20 "*" Diode 127.5,142.5 r180 bottom
VD21 "*" Diode 97.5,142.5 r180 bottom
VD22 "*" Diode 90,142.5 r180 bottom
VD23 "*" Diode 112.025,85 r0 top
VD24 "*" Diode 12.025,105 r0 top
VT1 "*" "Transistor 1" 152.5,95 r0 top
VT2 "MOP TRANSISTOR" TR 35,127.5 r90 bottom
VT3 "*" "Transistor 1" 27.5,127.5 r0 top
VT4 "*" "Transistor 1" 12.5,12.5 r0 top
VT5 "*" "Transistor 1" 80,10 r0 top
VT6 "*" "Transistor 1" 107.5,22.5 r0 top
VT7 "*" "Transistor 1" 130,47.5 r270 top
VT8 "MOP TRANSISTOR" TR 117.5,58 r90 top
VT9 "*" "Transistor 1" 40,30.5 r180 bottom
VT10 "*" "Transistor 1" 75,30 r180 bottom
VT11 "*" "Transistor 1" 5,25 r180 bottom
VT12 "*" "Transistor 1" 120,70 r180 bottom
VT13 "MOP TRANSISTOR" TR 102.5,125 r90 bottom
VT14 "*" "Transistor 1" 135,127.5 r180 bottom
VT15 "*" "Transistor 1" 122.5,137.5 r180 bottom
X1 "*" "DVI Connector" 157.5,133 r0 top
X2 "*" DF14A 2.5,100.5 r0 top
X3 "*" BUSES 2.5,95 r0 top
X4 "*" J101 157.5,45.5 r0 top
X5 "*" J601 2.5,30.5 r0 top
X6 "*" "VGA Connector" 21.5,147.5 r90 top

## Footprints (in the part's own frame and the unit in brackets; to place one, negate y for a bottom-side part, rotate by r counter-clockwise, add the part's x,y. Pads: shape width x height; smd on the part's side, far side on the other; paste and mask are expansions set on the pad)
AP494A_1 [mm]
  oval 1.5x0.8 smd: 1(-3.1,3.85) 2(-3.1,2.75) 3(-3.1,1.65) 4(-3.1,0.55) 5(-3.1,-0.55) 6(-3.1,-1.65) 7(-3.1,-2.75) 8(-3.1,-3.85) 9(3.1,-3.85) 10(3.1,-2.75) 11(3.1,-1.65) 12(3.1,-0.55) 13(3.1,0.55) 14(3.1,1.65) 15(3.1,2.75) 16(3.1,3.85)
  silkscreen extent -3.22,-5 1.85,5, body extent -2.25,-5 2.25,5, height 2.35
BUSES [mm]
  round 1 hole 0.75: 1(0,0) 2(0,-2) 3(0,-4) 4(0,-6) 5(0,-8) 6(0,-10) 7(0,-12) 8(0,-14) 9(0,-16) 10(0,-18) 11(0,-20) 12(0,-22) 13(0,-24) 14(0,-26) 15(0,-28) 16(0,-30) 17(0,-32) 18(0,-34) 19(0,-36) 20(0,-38) 21(0,-40) 22(0,-42) 23(0,-44) 24(0,-46)
"Capacitor 0805" [mm]
  rect 1.25x2 smd: 1(-1.5,0) 2(1.5,0)
  silkscreen extent -0.1,-1 0.1,1, body extent -1.75,-0.65 1.75,0.65, height 0.6
"D FF 2" [mm]
  oval 1.5x0.8 smd: 1(-3.1,1.65) 2(-3.1,0.55) 3(-3.1,-0.55) 4(-3.1,-1.65) 5(3.1,-1.65) 6(3.1,-0.55) 7(3.1,0.55) 8(3.1,1.65)
  silkscreen extent -3.22,-2.5 1.85,2.73, body extent -2.25,-2.5 2.25,2.5, height 2.35
DF14A [mm]
  round 1 hole 0.75: 1(0,0) 2(0,2) 3(0,4) 4(0,6) 5(0,8) 6(0,10) 7(0,12) 8(0,14) 9(0,16) 10(0,18) 11(0,20) 12(0,22) 13(0,24) 14(0,26) 15(0,28) 16(0,30) 17(0,32) 18(0,34) 19(0,36) 20(0,38)
Diode [mm]
  rect 1.95x2.25 smd: 1(-2.025,0) 2(2.025,0)
  silkscreen extent -3.07,-2 2.3,2, body extent -2.3,-1.97 2.3,1.97, height 1.1
"DVI Connector" [mm]
  round 1 hole 0.75: 1(0,0) 2(0,-2) 3(0,-4) 4(0,-6) 5(0,-8) 6(0,-10) 7(0,-12) 8(0,-14) 9(0,-16) 10(0,-18) 11(0,-20) 12(0,-22) 13(0,-24) 14(0,-26) 15(0,-28) 16(0,-30) 17(0,-32) 18(0,-34) 19(0,-36) 20(0,-38) 21(0,-40) 22(0,-42) 23(0,-44) 24(0,-46) 25(0,-48) 26(0,-50) 27(0,-52) 28(0,-54) 29(0,-56) 30(0,-58) 31(0,-60) 32(0,-62)
GENERATOR-25MHZ [mm]
  oval 1.6x1 smd: 1(-3.15,0.635) 2(-3.15,-0.635) 3(3.15,-0.635) 4(3.15,0.635)
  silkscreen extent -3.27,-2 1.95,2, body extent -2,-2 2,2, height 2.65
IC102 [mm]
  oval 1.9x1 smd: 1(-4.75,1.905) 2(-4.75,0.635) 3(-4.75,-0.635) 4(-4.75,-1.905) 5(4.75,-1.905) 6(4.75,-0.635) 7(4.75,0.635) 8(4.75,1.905)
  silkscreen extent -4.87,-2.75 3.4,3.08, body extent -3.8,-2.75 3.8,2.75, height 2.65
IC103_2 [mm]
  rect 0.75x0.9 smd: 1(-1.075,1.5) 2(-1.075,0) 3(-1.075,-1.5) 4(1.075,-1.5) 5(1.075,1.5)
  silkscreen extent -1.2,-2 0.3,2.62, body extent -0.7,-2 0.7,2, height 1.1
"Inductor 2520" [mm]
  rect 1x2 smd: 1(-1.15,0) 2(1.15,0)
  silkscreen extent -1.91,-1 0.1,1.26, body extent -1.3,-0.65 1.3,0.65, height 0.6
J101 [mm]
  round 1 hole 0.75: 1(0,0) 2(0,-2) 3(0,-4) 4(0,-6) 5(0,-8) 6(0,-10) 7(0,-12) 8(0,-14) 9(0,-16) 10(0,-18) 11(0,-20) 12(0,-22)
J601 [mm]
  round 1 hole 0.75: 1(0,0) 2(0,2) 3(0,4) 4(0,6) 5(0,8) 6(0,10) 7(0,12)
MIC39 [mm]
  rect 0.75x0.9 smd: 1(-1.075,1) 2(-1.075,-1) 3(1.075,0)
  silkscreen extent -1.2,-1.5 0.7,2.12, body extent -0.7,-1.5 0.7,1.5, height 1.1
MIC5205 [mm]
  rect 0.75x1 smd: 1(-1.075,1.3) 2(-1.075,0) 3(-1.075,-1.3) 4(1.075,-1.3) 5(1.075,1.3)
  silkscreen extent -1.2,-2 0.3,2.47, body extent -0.7,-2 0.7,2, height 1.1
NT68 [mm]
  oval 0.95x3 smd: 1(0,8.15)
  oval 0.95x2.2 smd: 2(-1.27,8.55) 3(-2.54,8.55) 4(-3.81,8.55) 5(-5.08,8.55) 6(-6.35,8.55) 18(-6.35,-8.55) 19(-5.08,-8.55) 20(-3.81,-8.55) 21(-2.54,-8.55) 22(-1.27,-8.55) 23(0,-8.55) 24(1.27,-8.55) 25(2.54,-8.55) 26(3.81,-8.55) 27(5.08,-8.55) 28(6.35,-8.55) 40(6.35,8.55) 41(5.08,8.55) 42(3.81,8.55) 43(2.54,8.55) 44(1.27,8.55)
  oval 2.2x0.95 smd: 7(-8.55,6.35) 8(-8.55,5.08) 9(-8.55,3.81) 10(-8.55,2.54) 11(-8.55,1.27) 12(-8.55,0) 13(-8.55,-1.27) 14(-8.55,-2.54) 15(-8.55,-3.81) 16(-8.55,-5.08) 17(-8.55,-6.35) 29(8.55,-6.35) 30(8.55,-5.08) 31(8.55,-3.81) 32(8.55,-2.54) 33(8.55,-1.27) 34(8.55,0) 35(8.55,1.27) 36(8.55,2.54) 37(8.55,3.81) 38(8.55,5.08) 39(8.55,6.35)
  silkscreen extent -9.1,-9.1 9.1,10.32, body extent -9,-9 9,9, height 2.54
OMG_1 [mm] "QFP, 160-Leads, Body 45,00x45,00mm, Pitch 1,20mm, IPC Medium Density"
  oval 1.85x0.7 smd: 1(-25.475,23.4) 2(-25.475,22.2) 3(-25.475,21) 4(-25.475,19.8) 5(-25.475,18.6) 6(-25.475,17.4) 7(-25.475,16.2) 8(-25.475,15) 9(-25.475,13.8) 10(-25.475,12.6) 11(-25.475,11.4) 12(-25.475,10.2) 13(-25.475,9) 14(-25.475,7.8) 15(-25.475,6.6) 16(-25.475,5.4) 17(-25.475,4.2) 18(-25.475,3) 19(-25.475,1.8) 20(-25.475,0.6) 21(-25.475,-0.6) 22(-25.475,-1.8) 23(-25.475,-3) 24(-25.475,-4.2) 25(-25.475,-5.4) 26(-25.475,-6.6) 27(-25.475,-7.8) 28(-25.475,-9) 29(-25.475,-10.2) 30(-25.475,-11.4) 31(-25.475,-12.6) 32(-25.475,-13.8) 33(-25.475,-15) 34(-25.475,-16.2) 35(-25.475,-17.4) 36(-25.475,-18.6) 37(-25.475,-19.8) 38(-25.475,-21) 39(-25.475,-22.2) 40(-25.475,-23.4) 81(25.475,-23.4) 82(25.475,-22.2) 83(25.475,-21) 84(25.475,-19.8) 85(25.475,-18.6) 86(25.475,-17.4) 87(25.475,-16.2) 88(25.475,-15) 89(25.475,-13.8) 90(25.475,-12.6) 91(25.475,-11.4) 92(25.475,-10.2) 93(25.475,-9) 94(25.475,-7.8) 95(25.475,-6.6) 96(25.475,-5.4) 97(25.475,-4.2) 98(25.475,-3) 99(25.475,-1.8) 100(25.475,-0.6) 101(25.475,0.6) 102(25.475,1.8) 103(25.475,3) 104(25.475,4.2) 105(25.475,5.4) 106(25.475,6.6) 107(25.475,7.8) 108(25.475,9) 109(25.475,10.2) 110(25.475,11.4) 111(25.475,12.6) 112(25.475,13.8) 113(25.475,15) 114(25.475,16.2) 115(25.475,17.4) 116(25.475,18.6) 117(25.475,19.8) 118(25.475,21) 119(25.475,22.2) 120(25.475,23.4)
  oval 0.7x1.85 smd: 41(-23.4,-25.475) 42(-22.2,-25.475) 43(-21,-25.475) 44(-19.8,-25.475) 45(-18.6,-25.475) 46(-17.4,-25.475) 47(-16.2,-25.475) 48(-15,-25.475) 49(-13.8,-25.475) 50(-12.6,-25.475) 51(-11.4,-25.475) 52(-10.2,-25.475) 53(-9,-25.475) 54(-7.8,-25.475) 55(-6.6,-25.475) 56(-5.4,-25.475) 57(-4.2,-25.475) 58(-3,-25.475) 59(-1.8,-25.475) 60(-0.6,-25.475) 61(0.6,-25.475) 62(1.8,-25.475) 63(3,-25.475) 64(4.2,-25.475) 65(5.4,-25.475) 66(6.6,-25.475) 67(7.8,-25.475) 68(9,-25.475) 69(10.2,-25.475) 70(11.4,-25.475) 71(12.6,-25.475) 72(13.8,-25.475) 73(15,-25.475) 74(16.2,-25.475) 75(17.4,-25.475) 76(18.6,-25.475) 77(19.8,-25.475) 78(21,-25.475) 79(22.2,-25.475) 80(23.4,-25.475) 121(23.4,25.475) 122(22.2,25.475) 123(21,25.475) 124(19.8,25.475) 125(18.6,25.475) 126(17.4,25.475) 127(16.2,25.475) 128(15,25.475) 129(13.8,25.475) 130(12.6,25.475) 131(11.4,25.475) 132(10.2,25.475) 133(9,25.475) 134(7.8,25.475) 135(6.6,25.475) 136(5.4,25.475) 137(4.2,25.475) 138(3,25.475) 139(1.8,25.475) 140(0.6,25.475) 141(-0.6,25.475) 142(-1.8,25.475) 143(-3,25.475) 144(-4.2,25.475) 145(-5.4,25.475) 146(-6.6,25.475) 147(-7.8,25.475) 148(-9,25.475) 149(-10.2,25.475) 150(-11.4,25.475) 151(-12.6,25.475) 152(-13.8,25.475) 153(-15,25.475) 154(-16.2,25.475) 155(-17.4,25.475) 156(-18.6,25.475) 157(-19.8,25.475) 158(-21,25.475) 159(-22.2,25.475) 160(-23.4,25.475)
  silkscreen extent -25.6,-24.15 24.15,24.42, body extent -22.5,-22.5 22.5,22.5, height 2.45
PQ05 [mm]
  rect 1x1 smd: 1(-1.2,1.5) 2(-1.2,0) 3(-1.2,-1.5) 4(1.2,-1.5) 5(1.2,1.5)
  silkscreen extent -1.33,-2.5 0.3,2.67, body extent -0.7,-2.5 0.7,2.5, height 1.1
"Resistor 1206" [mm]
  rect 1x1.6 smd: 1(-1.5,0) 2(1.5,0)
  silkscreen extent -0.1,-0.75 0.1,0.75, body extent -1.7,-0.6 1.7,0.6, height 0.6
THC63_1 [mm]
  oval 1.5x0.8 smd: 1(-3.1,14.85) 2(-3.1,13.75) 3(-3.1,12.65) 4(-3.1,11.55) 5(-3.1,10.45) 6(-3.1,9.35) 7(-3.1,8.25) 8(-3.1,7.15) 9(-3.1,6.05) 10(-3.1,4.95) 11(-3.1,3.85) 12(-3.1,2.75) 13(-3.1,1.65) 14(-3.1,0.55) 15(-3.1,-0.55) 16(-3.1,-1.65) 17(-3.1,-2.75) 18(-3.1,-3.85) 19(-3.1,-4.95) 20(-3.1,-6.05) 21(-3.1,-7.15) 22(-3.1,-8.25) 23(-3.1,-9.35) 24(-3.1,-10.45) 25(-3.1,-11.55) 26(-3.1,-12.65) 27(-3.1,-13.75) 28(-3.1,-14.85) 29(3.1,-14.85) 30(3.1,-13.75) 31(3.1,-12.65) 32(3.1,-11.55) 33(3.1,-10.45) 34(3.1,-9.35) 35(3.1,-8.25) 36(3.1,-7.15) 37(3.1,-6.05) 38(3.1,-4.95) 39(3.1,-3.85) 40(3.1,-2.75) 41(3.1,-1.65) 42(3.1,-0.55) 43(3.1,0.55) 44(3.1,1.65) 45(3.1,2.75) 46(3.1,3.85) 47(3.1,4.95) 48(3.1,6.05) 49(3.1,7.15) 50(3.1,8.25) 51(3.1,9.35) 52(3.1,10.45) 53(3.1,11.55) 54(3.1,12.65) 55(3.1,13.75) 56(3.1,14.85)
  silkscreen extent -3.22,-16 1.85,16, body extent -2.25,-16 2.25,16, height 2.35
TR [mm]
  oval 1.6x1 smd: 1(-3.15,0.635) 2(-3.15,-0.635) 3(3.15,-0.635) 4(3.15,0.635)
  silkscreen extent -3.27,-2 1.95,2, body extent -2,-2 2,2, height 2.65
"Transistor 1" [mm]
  rect 1x1 smd: 1(-1.2,0.95) 2(-1.2,-0.95) 3(1.2,0)
  silkscreen extent -1.32,-1.5 0.7,2.12, body extent -0.7,-1.5 0.7,1.5, height 1.1
"VGA Connector" [mm]
  round 1 hole 0.75: 1(0,0) 2(0,-4) 3(0,-8) 4(0,-12) 5(0,-16) 6(0,-20) 7(0,-24) 8(0,-28) 9(0,-2) 10(0,-6) 11(0,-10) 12(0,-14) 13(0,-18) 14(0,-22) 15(0,-26) 16(0,2) 17(0,4)

## Part data
C1 C2 C3 C4 C5 C6 C7 C9 C10 C11 C12 C13 C14 C15 C16 C17 C18 C19 C20 C21 C23 C25 C26 C27 C28 C29 C30 C31 C32 C33 C34 C35 C36 C38 C39 C40 C41 C42 C43 C45 C46 C48 C49 C50 C51 C52 C53 C54 C55 C56 C57 C58 C59 C60 C61 C62 C63 C65 C66 C67 C68 C69 C71 C73 C74 C76 C77 C79 C81 C83 C84 C86 C87 C88 C89 C90 C91 C92 C93 C94 C95 C96 C98 C99 C100 C101 C102 C103 C104 C105 C106 C107 C108 C110 C111 C113 C114 C115 C116 C117 C118 C119 C120 C121 C122 C124 C125 C126 C127 C128 C129 C130 C131 C132 C133 C134 C135 C136 C137 C138 C139 C140 C141 C142 C143 C144 C145 C148 C149: library part Capacitor
C8 C22 C24 C37 C44 C47 C64 C70 C72 C75 C78 C80 C82 C85 C97 C109 C112 C123 C146 C147 C150: library part "Capacitor Duga"
DA2: library part NT68
DA3: library part IC102
DA4: library part AP494A
DA5: library part PQ05
DA7: library part MIC52
DA8: library part OMG
DD1: library part THC63
DD2: library part 74F74
DD3: library part MIC39
G1: library part MHZ25
L1 L2 L3 L4 L5 L6 L7 L8 L9 L10 L11 L12 L13 L14 L15 L16 L17 L18 L19 L20 L21 L22 L23 L24 L25 L26 L27 L28 L29 L30 L31 L32 L33 L34 L35 L36 L37 L38 L39 L40 L41 L42 L43 L44 L45 L46 L47: library part Inductor
R1 R2 R3 R4 R5 R6 R7 R8 R9 R10 R11 R12 R13 R14 R15 R16 R17 R18 R19 R20 R21 R22 R23 R24 R25 R26 R27 R28 R29 R30 R31 R32 R33 R34 R35 R36 R37 R38 R39 R40 R41 R42 R43 R44 R45 R46 R47 R48 R49 R50 R51 R52 R53 R54 R55 R56 R57 R58 R59 R60 R61 R62 R63 R64 R65 R66 R67 R68 R69 R70 R71 R72 R73 R74 R75 R76 R77 R78 R79 R80 R81 R82 R83 R84 R85 R86 R87 R88 R89 R90 R91 R92 R93 R94 R95 R96 R97 R98 R99 R100 R101 R102 R103 R104 R105 R106 R107 R108 R109 R110 R111 R112 R113 R114 R115 R116 R117 R118 R119 R120 R121 R122 R123 R124 R125 R126 R127 R128 R129 R130 R131 R132 R133 R134 R135 R136 R137 R138 R139 R140: library part Resistor
U1 U2 U3 U4: library part "Schmitt Inv"
VD2 VD3 VD5 VD8 VD9 VD10 VD11 VD12 VD13 VD14 VD16 VD18 VD23 VD24: library part "Diode 1"
VD6 VD7 VD15 VD17 VD19 VD20 VD21 VD22: library part "Diode 2"
VT1 VT3 VT4 VT7 VT11 VT14 VT15: library part "Transistor 1"
VT5 VT6 VT12: library part "Transistor 2"
VT9: library part "Transistor 1_1"
VT10: library part "Transistor 2_1"
X1: library part "DVI Connector"
X2: library part DF14A
X3: library part J102
X4: library part J101
X5: library part J601
X6: library part "VGA connector"

## Free pads (board coordinates)
  round 2 hole 2: 1(2.5,2.5) 2(157.5,2.5) 3(157.5,147.5) 4(2.5,147.5)

## Nets (pads, with @x,y where several pads share a name; then routed paths per layer and width w, separated by ;. In a path a pad name is that pad's centre, name@x,y a point inside that pad or via, vN(x,y) a via of type N, cw(c..) or ccw(c..) an arc to the next point about the centre after c; other vN are vias at no path point)
ADCPWR_CTL: DA2.36 R26.1 R100.1
AGND: C86.1 C87.1 C89.1 C92.1 C93.1 C94.1 C95.1 C96.1 C109.1 C110.1 C111.1 C140.1 C141.1 C142.1 C143.1 C144.1 C145.1 C146.1 DA8.1 DA8.3 DA8.10 DA8.12 DA8.14 DA8.19 DA8.21 DA8.88 DA8.90 DA8.100 DA8.102 DA8.112 DA8.122 DA8.124 DA8.131 DA8.142 DA8.144 DA8.146 DA8.151 DA8.153 DA8.154 DA8.155 DA8.156 DA8.158 R86.1 R87.1 R91.1 U2.3 VD8.1 VD10.2 VD13.2 VD17.1 VD21.1 VD22.1 VD23.1 X6.16 X6.17
AH: C93.2 DA8.141 R82.2
AV: C94.2 DA8.140 R84.2
B_IN: C89.2 L28.2 R89.1 VD13.1 VD14.2
BACKLIG_ON_OFF: R28.2 R71.2 VT4.2
BO0: C32.2 DD1.16 R117.1
BO1: C31.2 DD1.19 R118.1
BO2: C30.2 DD1.20 R120.1
BO3: C29.2 DD1.21 R122.1
BO4: C28.2 DD1.22 DD1.23 R125.1
BO5: C27.2 R128.1
BO6: C26.2 DD1.17 R131.1
BO7: C25.2 DD1.18 R134.1
BPCLK: DD1.46 R20.2
BRIGHTNESS: R73.2 R97.1 VT15.2
CSG2: DA8.55 L46.2
CSG4: DA8.127 R110.2
DVI_B: R11.1 R12.1 R13.1 R14.1
DVI_DETN: DA2.31 L2.2 VT1.2
DVI_SCL: C2.2 R6.2 R7.1
DVI_SDA: C3.2 R5.2 R8.1
EXIT: DA2.23 L19.2 R38.1
G_IN: C87.2 C130.2 L27.2 R95.1 VD10.1 VD11.2
GND: C1.1 C2.1 C3.1 C4.1 C5.1 C6.1 C7.1 C8.1 C9.2 C10.2 C11.2 C12.2 C13.2 C14.2 C15.2 C16.2 C17.2 C18.2 C19.2 C20.2 C21.1 C22.1 C23.1 C24.1 C25.1 C26.1 C27.1 C28.1 C29.1 C30.1 C31.1 C32.1 C33.1 C34.1 C35.1 C36.1 C37.1 C38.1 C39.1 C40.1 C41.1 C42.1 C43.1 C44.1 C45.2 C46.2 C47.1 C48.2 C49.2 C50.1 C51.1 C52.1 C53.1 C54.1 C55.1 C56.1 C57.1 C58.1 C59.1 C60.1 C61.1 C62.1 C63.1 C64.1 C65.1 C66.2 C68.1 C69.1 C70.1 C71.1 C72.1 C73.1 C74.1 C74.2 C75.1 C76.2 C77.2 C78.1 C79.1 C80.1 C81.1 C82.1 C83.1 C84.1 C85.2 C88.1 C90.1 C91.1 C97.1 C98.1 C99.1 C100.1 C101.1 C102.1 C103.1 C104.1 C105.1 C106.1 C107.1 C108.1 C112.1 C113.1 C114.1 C115.1 C116.1 C117.1 C118.1 C119.1 C120.1 C121.2 C124.1 C125.1 C126.1 C127.1 C136.2 C137.1 C138.1 C139.1 C147.1 C148.1 C149.1 C150.1 DA1.1 DA1.2 DA3.4 DA4.1 DA4.8 DA4.9 DA4.12 DA4.14 DA5.5 DA6.1 DA6.2 DA6.5 DA7.2 DA8.45 DA8.46 DA8.48 DA8.56 DA8.66 DA8.70 DA8.71 DA8.78 DD1.39 DD1.41 DD1.42 DD1.43 DD1.45 DD1.52 DD1.53 DD1.54 DD1.55 DD1.56 DD2.5 DD2.6 DD3.3 G1.2 L10.2 L11.2 L22.1 L46.1 R10.1 R16.2 R19.2 R49.1 R56.1 R57.1 R60.1 R65.2 R66.2 R70.1 R76.1 R105.1 R106.2 R107.1 R109.1 R110.1 R111.1 VD2.1 VD3.1 VD7.1 VD15.1 VD19.1 VD20.1 VT1.1 VT3.1 VT4.1 VT10.2 VT11.1 VT14.1 VT15.1 X1.3 X1.11 X1.15 X1.19 X1.22 X1.25 X1.26 X2.2 X2.5 X2.8 X2.11 X2.14 X2.17 X2.18 X3.3 X5.3 X5.4 X6.4 X6.5 X6.6 X6.7 X6.8 X6.10 X6.11
GO0: C17.1 DD1.8 R119.1
GO1: C18.1 DD1.9 R121.1
GO2: C19.1 DD1.10 R124.1
GO3: C20.1 DD1.13 R127.1
GO4: C36.2 DD1.14 R130.1
GO5: C35.2 DD1.15 R133.1
GO6: C34.2 DD1.11 R136.1
GO7: C33.2 DD1.12 R138.1
LED_G: C54.2 L9.1 X4.12
LED_G_CTL: DA2.2 R45.1
LED_R: C52.2 L8.1 X4.11
LED_R_CTL: DA2.3 R41.1
LEFT: DA2.22 L18.2 R37.1
LVDSPWR: DA2.33 DD1.47
MINUS: DA2.20 L16.2 R35.1
NetC4_2: C4.2 R9.2 R10.2 VT1.3
NetC5_2: C5.2 C6.2 C7.2 C8.2 DD1.48 DD1.49 DD1.51 L3.1 R15.2
NetC21_2: C21.2 C22.2 DD1.44 L4.1
NetC23_2: C23.2 C24.2 DD1.40 L5.1
NetC44_2: C44.2 C45.1 C46.1 DA2.5 L7.1 R21.2
NetC47_2: C47.2 C48.1 DA1.4 DA2.4 R21.1
NetC53_2: C53.2 L12.1 X4.3
NetC55_2: C55.2 L13.1 X4.4
NetC56_2: C56.2 L14.1 X4.5
NetC58_2: C58.2 L15.1 X4.6
NetC59_2: C59.2 L19.1 X4.10
NetC60_2: C60.2 L18.1 X4.9
NetC61_2: C61.2 L17.1 X4.8
NetC62_2: C62.2 L16.1 X4.7
NetC63_2: C63.2 C64.2 L20.2 R50.1 R51.1
NetC65_2: C65.2 R53.1
NetC66_1: C66.1 DA4.7
NetC67_1: C67.1 DA4.5 R58.1
NetC67_2: C67.2 R59.1
NetC68_2: C68.2 DA5.1 L21.1
NetC69_2: C69.2 L23.2
NetC72_2: C72.2 C73.2 DA6.4 DD2.4 R66.1
NetC75_2: C75.2 R68.2 R69.1
NetC76_1: C76.1 L24.1 X5.5 X5.6
NetC78_2: C78.2 C79.2 L24.2 L25.1
NetC82_2: C82.2 C83.2 R72.1 X5.1
NetC84_2: C84.2 R71.1 X5.2
NetC85_1: C85.1 R72.2 R73.1
NetC88_2: C88.2 DA7.1 DA7.3 R77.1 VD16.2 VD18.2
NetC90_2: C90.2 DA7.4
NetC91_2: C91.2 DA7.5 R77.2 VD15.2 VT12.2
NetC92_2: C92.2 L29.2 VD16.1 VD17.2
NetC95_2: C95.2 L33.2 R85.1 R86.2 VD21.2
NetC96_2: C96.2 L32.2 R83.1 R87.2 VD22.2
NetC109_2: C109.2 C110.2 C111.2 DA8.159 L35.2 R88.2
NetC121_1: C121.1 DA8.8
NetC122_1: C122.1 DA8.2
NetC122_2: C122.2 R89.2 R90.2
NetC123_1: C123.1 C128.2 C131.2 DA8.149
NetC123_2: C123.2 C128.1 C131.1 DA8.150 L38.2
NetC129_1: C129.1 DA8.4
NetC129_2: C129.2 R92.2
NetC130_1: C130.1 DA8.11
NetC132_1: C132.1 DA8.13
NetC132_2: C132.2 R95.2 R96.2
NetC133_1: C133.1 DA8.15
NetC133_2: C133.2 R98.2
NetC134_1: C134.1 DA8.20
NetC134_2: C134.2 R99.2 R102.2
NetC135_1: C135.1 DA8.22
NetC135_2: C135.2 R104.2
NetC137_2: C137.2 C138.2 G1.4 L42.2
NetC139_2: C139.2 DA8.47 R112.2
NetC147_2: C147.2 C148.2 DD3.1 L47.2 VD24.1
NetC149_2: C149.2 C150.2 DD3.2 L45.1 VD24.2
NetDA2_12: DA2.12 R23.1 R31.2
NetDA2_13: DA2.13 R22.1 R32.2
NetDA2_34: DA2.34 R30.1 R40.1
NetDA4_2: DA4.2 R54.1 R56.2
NetDA4_4: DA4.4 R55.1 R57.2 R58.2 R59.2
NetDA4_6: DA4.6 R60.2
NetDA4_10: DA4.10 L22.2 VT9.2
NetDA4_11: DA4.11 R61.2 VT9.1
NetDA4_13: DA4.13 DA4.15 R52.1 VD5.2 VT7.3
NetDA8_9: DA8.9 R93.2
NetDA8_26: DA8.26 DA8.38
NetDA8_43: DA8.43 R109.2
NetDA8_44: DA8.44 R111.2
NetDA8_49: DA8.49 DA8.57 DA8.67 DA8.79
NetDA8_50: DA8.50 R113.2
NetDA8_52: DA8.52 R114.2
NetDA8_53: DA8.53 R115.2
NetDA8_54: DA8.54 R116.2
NetDA8_58: DA8.58 R117.2
NetDA8_59: DA8.59 R118.2
NetDA8_60: DA8.60 R120.2
NetDA8_61: DA8.61 R122.2
NetDA8_62: DA8.62 R125.2
NetDA8_63: DA8.63 R128.2
NetDA8_64: DA8.64 R131.2
NetDA8_65: DA8.65 R134.2
NetDA8_68: DA8.68 R119.2
NetDA8_69: DA8.69 R121.2
NetDA8_72: DA8.72 R124.2
NetDA8_73: DA8.73 R127.2
NetDA8_74: DA8.74 R130.2
NetDA8_75: DA8.75 R133.2
NetDA8_76: DA8.76 R136.2
NetDA8_77: DA8.77 R138.2
NetDA8_80: DA8.80 R140.1
NetDA8_81: DA8.81 R139.1
NetDA8_82: DA8.82 R137.1
NetDA8_83: DA8.83 R135.1
NetDA8_84: DA8.84 R132.1
NetDA8_85: DA8.85 R129.1
NetDA8_86: DA8.86 R126.1
NetDA8_87: DA8.87 R123.1
NetDA8_126: DA8.126 R108.1
NetDA8_135: DA8.135 R106.1
NetDA8_139: DA8.139 R101.1 R103.1
NetDA8_160: DA8.160 R91.2
NetDD1_50: DD1.50 R15.1 R16.1
NetDD2_1: DD2.1 R65.1
NetDD2_2: DD2.2 DD2.7
NetG1_3: G1.3 R112.1
NetL1_2: L1.2 R1.2 R2.2 R3.2 R4.2
NetL6_2: L6.2 R17.2 VD1.2 VT2.3 VT2.4
NetL8_2: L8.2 R44.1
NetL9_2: L9.2 R47.1
NetL10_1: L10.1 X4.1
NetL11_1: L11.1 X4.2
NetL20_1: L20.1 R53.2 VD2.2 VD3.2 VD4.1 VT8.2
NetL26_1: L26.1 X6.1
NetL27_1: L27.1 X6.2
NetL28_1: L28.1 X6.3
NetL29_1: L29.1 X6.9
NetL30_1: L30.1 X6.12
NetL30_2: L30.2 R80.1 VD20.2
NetL31_1: L31.1 X6.15
NetL31_2: L31.2 R81.1 VD19.2
NetL32_1: L32.1 X6.13
NetL33_1: L33.1 X6.14
NetL40_1: L40.1 VT13.3 VT13.4
NetL41_1: L41.1 VT13.2
NetR5_1: R5.1 X1.6
NetR6_1: R6.1 X1.7
NetR9_1: R9.1 X1.14 X1.16
NetR17_1: R17.1 VT2.1 VT3.2
NetR18_2: R18.2 R19.1 VT3.3
NetR40_2: R40.2 VT4.3
NetR41_2: R41.2 R43.2 VT5.3
NetR44_2: R44.2 VT5.1
NetR45_2: R45.2 R46.2 VT6.3
NetR47_2: R47.2 VT6.1
NetR62_1: R62.1 VT9.3
NetR69_2: R69.2 R70.2 VT11.3
NetR75_1: R75.1 VT12.3
NetR82_1: R82.1 U1.5
NetR83_2: R83.2 U2.2
NetR84_1: R84.1 U3.5
NetR85_2: R85.2 U4.2
NetR88_1: R88.1 VD23.2
NetR94_1: R94.1 VT13.1 VT14.2
NetR100_2: R100.2 R105.2 VT14.3
NetR103_2: R103.2 R107.2 VT15.3
NetU1_2: U1.2 U2.5
NetU3_2: U3.2 U4.5
NetVD5_1: VD5.1 VT7.1 VT8.1
NetVD6_1: VD6.1 VT10.3
NEXT: DA2.18 L14.2 R39.2
p_3_3_v: DA4.3 VD6.2
PANELVCC_CTL: C39.2 DA2.35 R18.1 R27.1
PC_DET: DA2.30 R74.1 R76.2
PCLK: C40.2 R20.1 R114.1
PDE: C41.2 DD1.27 R108.2
PHD: C43.2 DD1.25 R115.1
PLUS: DA2.19 L15.2 R42.2
PVCC: C37.2 C38.2 VD1.1 VT2.2 X2.19 X2.20
PVD: C42.2 DD1.26 R116.1
PWR_EN: DD2.8 R61.1 R62.2 VT10.1
PWR_SW: L12.2 R48.1 R67.1 R68.1
R_IN: C86.2 L26.2 R90.1 R92.1 R93.1 R96.1 R98.1 R99.1 R102.1 R104.1 VD8.2 VD9.1
RESET: DA2.17 L13.2 R29.2
RIGHT: DA2.21 L17.2 R36.1
RO0: C9.1 DD1.1 R140.2 X3.1
RO1: C10.1 DD1.2 R139.2
RO2: C11.1 DD1.3 R137.2
RO3: C12.1 DD1.4 R135.2 X3.4
RO4: C13.1 DD1.5 R132.2
RO5: C14.1 DD1.7 R129.2
RO6: C15.1 DD1.28 R126.2
RO7: C16.1 DD1.6 R123.2
RX0+: DA8.33 R14.2 X1.18
RX0-: DA8.34 R13.2 X1.17
RX1+: DA8.30 R3.1 X1.10
RX1-: DA8.31 R4.1 X1.9
RX2+: DA8.5 DA8.7 DA8.16 DA8.18 DA8.23 DA8.25 DA8.27 R1.1 X1.2
RX2-: DA8.28 R2.1 X1.1
RXC+: DA8.37 R12.2 X1.24
RXC-: DA8.36 R11.2 X1.23
SCALER_INTN: C51.2 DA2.15 R24.1 R29.1 R34.2 R35.2 R36.2 R37.2 R38.2 R39.1 R42.1 R113.1
SCALER_RSTN: C50.2 DA2.14 DA8.51 R33.2
SCL: DA3.7 DA8.42 R23.2
SDA: DA3.8 DA8.41 R22.2
SOFT_PW: DA2.16 R24.2 R48.2
TP_CTL: DA2.32 DA5.2
TP_PWR: C77.1 L21.2 X5.7
TX0+: DD1.37 X2.15
TX0-: DD1.38 X2.16
TX1+: DD1.35 X2.12
TX1-: DD1.36 X2.13
TX2+: DD1.33 X2.9
TX2-: DD1.34 X2.10
TX3+: DD1.29 X2.3
TX3-: DD1.30 X2.4
TXC+: DD1.31 X2.6
TXC-: DD1.32 X2.7
VCC: C1.2 C49.1 C57.2 C70.2 C71.2 C80.2 C81.2 C97.2 C98.2 C99.2 C100.2 C101.2 C102.2 C103.2 C104.2 C105.2 C106.2 C107.2 C108.2 C112.2 C113.2 C114.2 C115.2 C116.2 C117.2 C118.2 C119.2 C120.2 C124.2 C125.2 C126.2 C127.2 C136.1 C140.2 C141.2 C142.2 C143.2 C144.2 C145.2 C146.2 DA1.5 DA3.5 DA4.16 DA5.3 DA8.6 DA8.17 DA8.24 DA8.29 DA8.35 DA8.39 DA8.40 DA8.89 DA8.91 DA8.101 DA8.103 DA8.113 DA8.123 DA8.125 DA8.132 DA8.143 DA8.145 DA8.147 DA8.152 DD2.3 L1.1 L2.1 L3.2 L4.2 L5.2 L6.1 L7.2 L23.1 L25.2 L34.1 L34.2 L35.1 L36.1 L36.2 L37.1 L37.2 L38.1 L39.1 L39.2 L40.2 L41.2 L42.1 L43.1 L43.2 L44.1 L44.2 L45.2 L47.1 R7.2 R8.2 R25.2 R26.2 R27.2 R28.1 R30.2 R31.1 R32.1 R33.1 R34.1 R43.1 R46.1 R50.2 R51.2 R52.2 R63.1 R63.2 R64.1 R64.2 R67.2 R74.2 R75.2 R78.2 R79.2 R94.2 R97.2 R101.2 U2.1 VD4.2 VD7.2 VD9.2 VD11.1 VD12.1 VD12.2 VD14.1 VD18.1 VT5.2 VT6.2 VT7.2 VT8.3 VT8.4 VT11.2 VT12.1 X3.2
VGA_SCL: DA2.26 R78.1 R81.2
VGA_SDA: DA2.25 R79.1 R80.2
Vref: R54.2 R55.2
WP: DA2.37 DA3.6 R25.1 R49.2
pads on no net: DA1.3 DA2.1 DA2.6 DA2.7 DA2.8 DA2.9 DA2.10 DA2.11 DA2.24 DA2.27 DA2.28 DA2.29 DA2.38 DA2.39 DA2.40 DA2.41 DA2.42 DA2.43 DA2.44 DA3.1 DA3.2 DA3.3 DA5.4 DA6.3 DA8.32 DA8.92 DA8.93 DA8.94 DA8.95 DA8.96 DA8.97 DA8.98 DA8.99 DA8.104 DA8.105 DA8.106 DA8.107 DA8.108 DA8.109 DA8.110 DA8.111 DA8.114 DA8.115 DA8.116 DA8.117 DA8.118 DA8.119 DA8.120 DA8.121 DA8.128 DA8.129 DA8.130 DA8.133 DA8.134 DA8.136 DA8.137 DA8.138 DA8.148 DA8.157 DD1.24 G1.1 U1.1 U1.3 U1.4 U2.4 U3.1 U3.3 U3.4 U4.1 U4.3 U4.4 X1.4 X1.5 X1.8 X1.12 X1.13 X1.20 X1.21 X1.27 X1.28 X1.29 X1.30 X1.31 X1.32 X2.1 X3.5 X3.6 X3.7 X3.8 X3.9 X3.10 X3.11 X3.12 X3.13 X3.14 X3.15 X3.16 X3.17 X3.18 X3.19 X3.20 X3.21 X3.22 X3.23 X3.24

## Keep-outs
Keep-Out Layer:
  the board outline again, w0.1